# Altium PCB LightSwitch.PcbDoc
Units mil, origin at the board's own origin, x right, y up, seen from the top; angles counter-clockwise.
Board outline 2362.21 x 4330.71 mil, 2 copper layers (Top Layer, Bottom Layer); 71 components, 40 nets, 206 pads, 10 vias.
Unrouted connection lines stored in the file: 10.
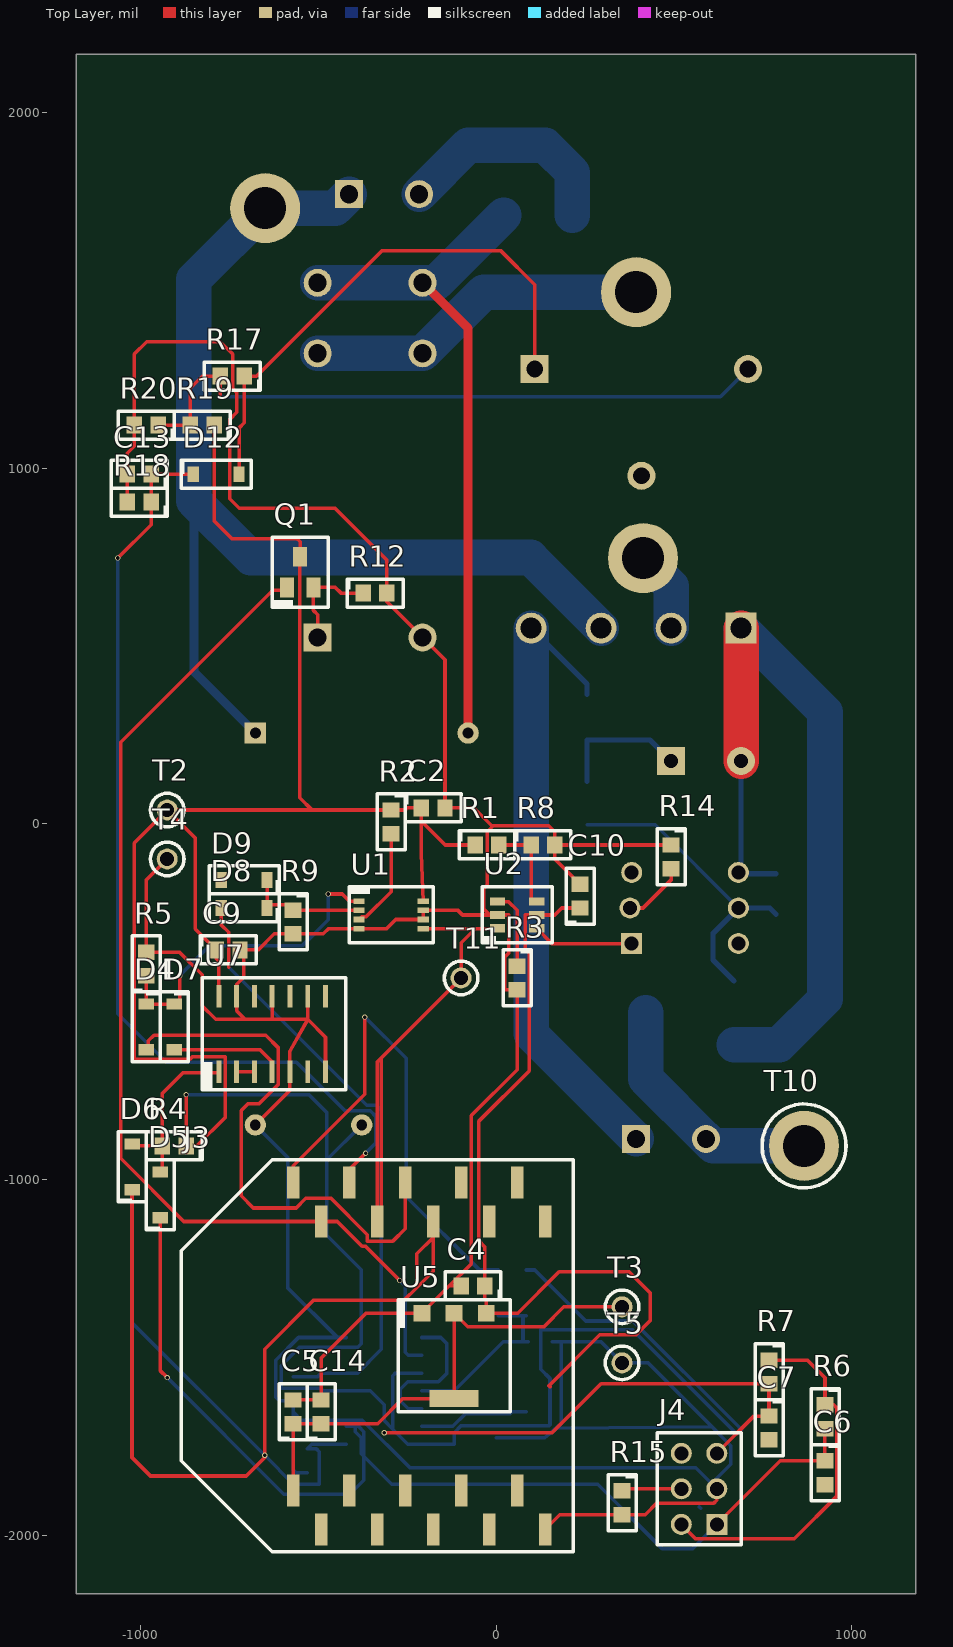
[diagram p0: Top Layer view]
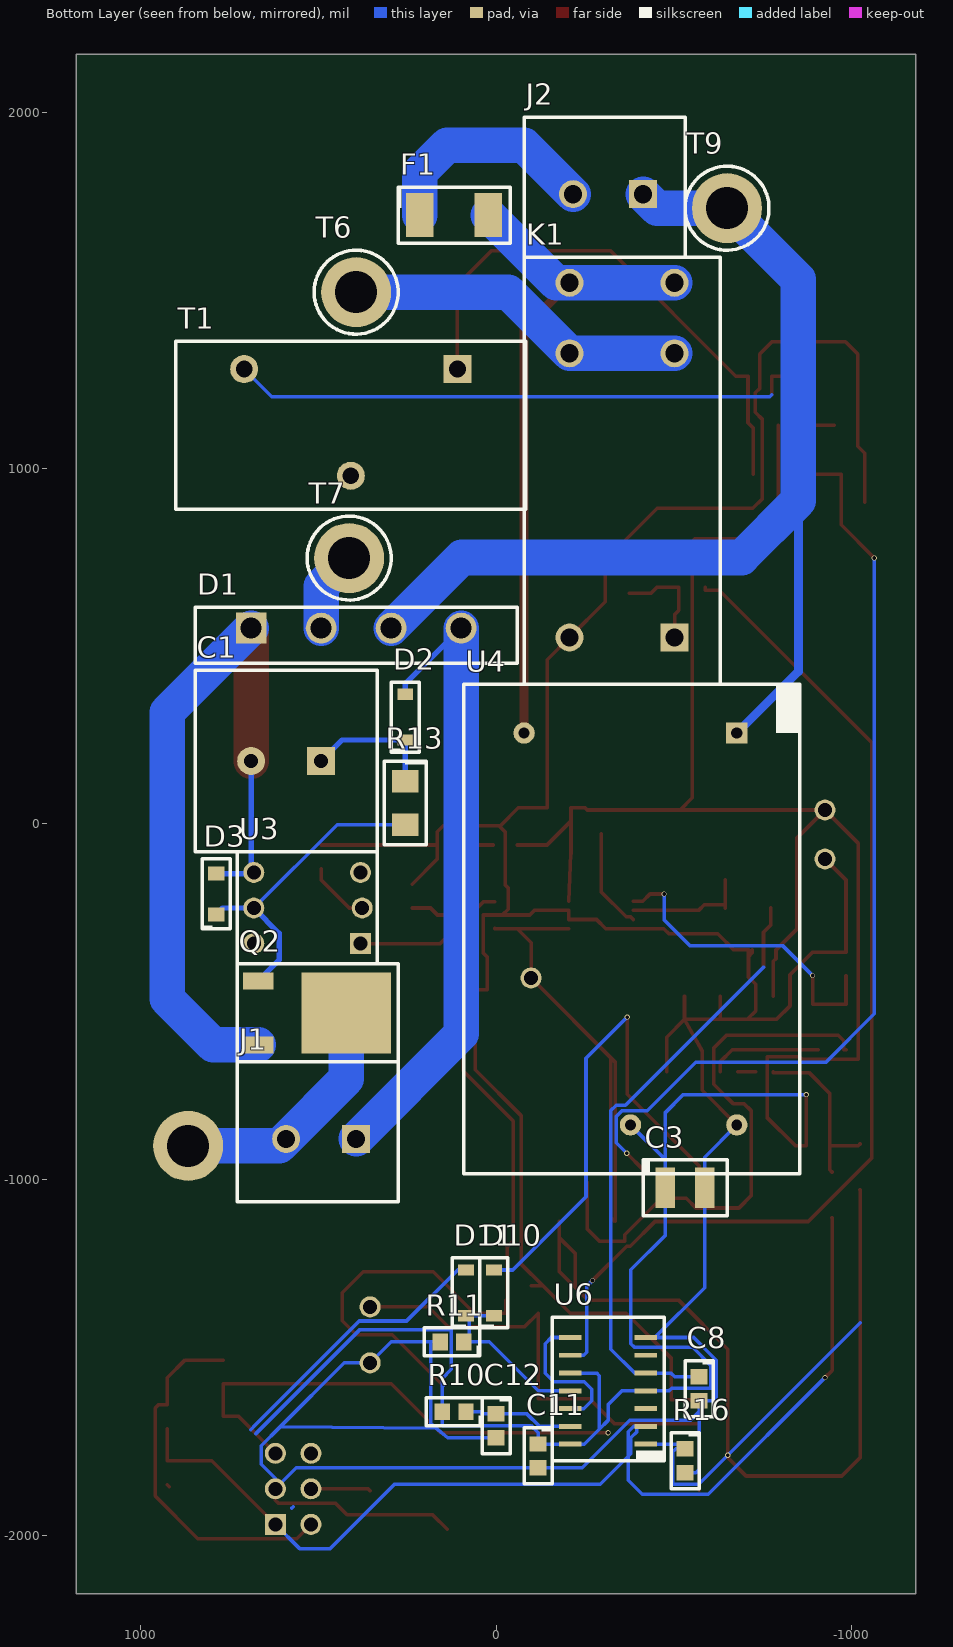
[diagram p1: Bottom Layer view, seen from below]

## Layer stack, top to bottom
Top Solder: solder mask 0.4, Solder Resist, Dk 3.5
Top Layer: signal copper 1.4
Dielectric 1: dielectric 12.6, FR-4, Dk 4.8
Bottom Layer: signal copper 1.4
Bottom Solder: solder mask 0.4, Solder Resist, Dk 3.5

## Board outline
1181.1,-2165.35 1181.1,2165.35 -1181.1,2165.35 -1181.1,-2165.35

## Design rules (kind name [scope] priority, off if disabled: settings)
Clearance [All] p1: gap=5 ignorepadtopadclearanceinfootprint=FALSE
PolygonConnect [All] p1: connectstyle=Relief reliefconductorwidth=10 reliefentries=4 polygonreliefangle="90 Angle" airgapwidth=10
RoutingVias [All] p1: holewidth=28 width=50 viastyle="Through Hole" minholewidth=28 minwidth=50 maxholewidth=28 maxwidth=50
SolderMaskExpansion [All] p1: expansion=4
Width "Schematic Width Constraint_12" [InNet('NetJ1_2')] p1: maxlimit=250 minlimit=15 preferedwidth=100 minimp=50.000000 maximp=50.000000 favimp=50.000000
Width "Schematic Width Constraint_4" [InNet('NetD1_4')] p2: maxlimit=250 minlimit=15 preferedwidth=100 minimp=50.000000 maximp=50.000000 favimp=50.000000
Width "Schematic Width Constraint_2" [InNet('NetF1_1')] p3: maxlimit=250 minlimit=15 preferedwidth=100 minimp=50.000000 maximp=50.000000 favimp=50.000000
Width "Schematic Width Constraint_1" [InNet('AC/L')] p4: maxlimit=250 minlimit=15 preferedwidth=100 minimp=50.000000 maximp=50.000000 favimp=50.000000
Width "Schematic Width Constraint" [InNet('AC/N')] p5: maxlimit=250 minlimit=15 preferedwidth=100 minimp=50.000000 maximp=50.000000 favimp=50.000000
Width "Schematic Width Constraint_6" [InNet('NetC1_2')] p6: maxlimit=250 minlimit=15 preferedwidth=100 minimp=50.000000 maximp=50.000000 favimp=50.000000
Width "Schematic Width Constraint_3" [InNet('NetK1_3')] p7: maxlimit=250 minlimit=100 preferedwidth=100 minimp=50.000000 maximp=50.000000 favimp=50.000000
Width "Schematic Width Constraint_5" [InNet('NetD1_2')] p8: maxlimit=250 minlimit=100 preferedwidth=100 minimp=50.000000 maximp=50.000000 favimp=50.000000
Width [All] p9: maxlimit=98425.2 minlimit=10 preferedwidth=10
30 further rules are at their usual default settings.

## Classes and differential pairs
component class Logic: C6 C7 C8 C9 C11 C12 D4 D5 D6 D7 D8 D9 D10 D11 J4 R4 R5 R6 R7 R9 R10 R11 R15 R16 U6 U7
component class XBee: C14 J3
component class Power: C3 C4 C5 C13 D12 F1 H1 J2 R17 R18 R19 R20 T1 T2 T3 T4 T5 U4 U5
component class Dimmer: C1 C2 C10 D1 D2 D3 J1 K1 Q1 Q2 R1 R2 R3 R8 R12 R13 R14 T6 T7 T9 T10 T11 U1 U2 U3

## Components (designator, comment, footprint, x,y, rotation, side; value= is the part's Value field where it differs from the comment)
C1 "CAP" CAP12.5X20 590.55,177.17 r0 bottom value=47uF
C2 "C_CAP_0603" 0603 -177.16,45.28 r90 top value=.1uF
C3 "C_CAP_1210" 1210 -531.5,-1023.62 r90 bottom value=100uF
C4 "C_CAP_0603" 0603 -64.96,-1299.21 r270 top value=.1uF
C5 "C_CAP_0603" 0603 -570.87,-1653.54 r180 top value=10uF
C6 "C_CAP_0603" 0603 925.2,-1824.8 r0 top value=.1uF
C7 "C_CAP_0603" 0603 767.72,-1698.82 r0 top value=.1uF
C8 "C_CAP_0603" 0603 -570.87,-1588.58 r180 bottom value=.1uF
C9 "C_CAP_0603" 0603 -753.94,-354.33 r90 top value=.1uF
C10 "C_CAP_0603" 0603 236.22,-202.75 r180 top value=.1uF
C11 "C_CAP_0603" 0603 -118.11,-1777.56 r180 bottom value=.1uF
C12 "C_CAP_0603" 0603 0,-1692.91 r180 bottom value=.1uF
C13 "C_CAP_0603" 0603 -1003.94,984.25 r270 top value=10uF
C14 "C_CAP_0603" 0603 -492.13,-1653.54 r180 top value=.1uF
D1 "D_RECTBRIDGE_GBU1506TB" GBU 393.7,551.18 r0 bottom
D2 "D_DIODE_SOD123" SOD123 255.91,300.59 r0 bottom
D3 "D_ZENER_SOD323" SOD323 787.4,-196.85 r0 bottom value=10V
D4 "D_DIODE_SOD123" SOD123 -984.25,-570.87 r0 top
D5 "D_DIODE_SOD123" SOD123 -944.88,-1043.31 r180 top
D6 "D_DIODE_SOD123" SOD123 -1023.62,-964.57 r180 top
D7 "D_DIODE_SOD123" SOD123 -905.51,-570.87 r0 top
D8 "D_DIODE_SOD123" SOD123 -708.66,-236.22 r270 top
D9 "D_DIODE_SOD123" SOD123 -708.66,-157.48 r270 top
D10 "D_DIODE_SOD123" SOD123 5.9,-1318.9 r0 bottom
D11 "D_DIODE_SOD123" SOD123 84.64,-1318.9 r0 bottom
D12 "D_DIODE_SOD123" SOD123 -787.4,984.25 r90 top
F1 "F_FUSE_2410" 2410 118.11,1712.6 r90 bottom value=12A/4A
J1 "J_2POSTERM_1935161" 1935161 492.13,-885.83 r0 bottom
J2 "J_2POSTERM_1935161" 1935161 -314.96,1771.65 r0 bottom
J3 "J_XBEE_NPPN101BFLC-RC" NPPN101BFLC-RC -216.54,-1496.06 r90 top
J4 "J_6POSM_M20-9980345" M20-9980345 570.87,-1870.08 r180 top
K1 "K_RELAY-RZ03-1A4_RZ03-1A4-D005" RZ03-1A4-D005 -354.33,1023.62 r270 bottom
Q1 "Q_NFET_SOT23" SOT23 -551.18,708.66 r0 top
Q2 "Q_NFET_TO252" TO252 669.29,-531.5 r270 bottom
R1 "R_RES_0603" 0603 -25.59,-59.06 r90 top value=1M
R2 "R_RES_0603" 0603 -295.27,5.91 r0 top value=806K
R3 "R_RES_0603" 0603 59.06,-433.07 r0 top value=196K
R4 "R_RES_0603" 0603 -905.51,-905.51 r270 top value=10K
R5 "R_RES_0603" 0603 -984.25,-393.7 r180 top value=10K
R6 "R_RES_0603" 0603 925.2,-1667.32 r0 top value=10K
R7 "R_RES_0603" 0603 767.72,-1541.34 r0 top value=10K
R8 "R_RES_0603" 0603 131.89,-59.06 r90 top value=280K
R9 "R_RES_0603" 0603 -570.87,-275.59 r0 top value=10K
R10 "R_RES_0603" 0603 118.11,-1653.54 r270 bottom value=470K
R11 "R_RES_0603" 0603 124.01,-1456.69 r270 bottom value=10K
R12 "R_RES_0603" 0603 -340.55,649.61 r90 top value=10K
R13 "R_RES_1206" 1206 255.91,59.06 r180 bottom value=100K
R14 "R_RES_0603" 0603 492.13,-92.52 r0 top value=180
R15 "R_RES_0603" 0603 354.33,-1909.45 r0 top value=10K
R16 "R_RES_0603" 0603 -531.5,-1791.34 r180 bottom value=10K
R17 "R_RES_0603" 0603 -742.13,1259.84 r270 top value=127
R18 "R_RES_0603" 0603 -1003.94,905.51 r270 top value=196K
R19 "R_RES_0603" 0603 -826.77,1122.05 r270 top value=10K
R20 "R_RES_0603" 0603 -984.25,1122.05 r270 top value=1.62K
T1 "T_CURRTRANS_AC1015" AC1015 408.66,1279.53 r180 bottom value=1000:1
T2 "TESTPOINT" TESTPOINT1MM -925.2,39.37 r0 top value=1mm
T3 "TESTPOINT" TESTPOINT1MM 354.33,-1358.27 r180 top value=1mm
T4 "TESTPOINT" TESTPOINT1MM -925.2,-98.43 r0 top value=1mm
T5 "TESTPOINT" TESTPOINT1MM 354.33,-1515.75 r180 top value=1mm
T6 "TESTPOINT" TESTPOINT3MM 393.7,1496.06 r270 bottom value=3mm
T7 "TESTPOINT" TESTPOINT3MM 413.39,748.03 r270 bottom value=3mm
T9 "TESTPOINT" TESTPOINT3MM -649.61,1732.28 r180 bottom value=3mm
T10 "TESTPOINT" TESTPOINT3MM 866.14,-905.51 r90 top value=3mm
T11 "TESTPOINT" TESTPOINT1MM -98.43,-433.07 r90 top value=1mm
U1 "U_DS4301_MSOP8" MSOP8 -295.28,-255.91 r270 top value=200K
U2 "U_LTC6992CS6-2_SOT23-6" SOT23-6 59.06,-255.91 r270 top
U3 "U_MCT275_DIP6" DIP6 531.5,-236.22 r0 bottom
U4 "U_IRM-02-5_IRM-02-5" IRM-02-5 -677.17,255.91 r270 bottom value=5V
U5 "U_LD1117S33TR_SOT223" SOT223 -118.11,-1496.06 r180 top value=3.3V
U6 "U_DUALDFLIP_SOIC14" SOIC14 -314.96,-1594.49 r90 bottom
U7 "U_SN74HCT04DR_SOIC14" SOIC14 -629.92,-590.55 r0 top

## Footprints (in the part's own frame and the unit in brackets; to place one, negate y for a bottom-side part, rotate by r counter-clockwise, add the part's x,y. Pads: shape width x height; smd on the part's side, far side on the other; paste and mask are expansions set on the pad)
0603 [mm]
  rect 1.2x1.1 smd: 1(0,0.85) 2(0,-0.85)
  silkscreen extent -1,-2 1,2, body extent -0.43,-0.77 0.43,0.78, height 0.44
1206 [mm]
  rect 1.9x1.6 smd: 1(0,1.55) 2(0,-1.55)
  silkscreen extent -1.5,-3 1.5,3, body extent -0.8,-1.6 0.8,1.6, height 1.5
1210 [mm]
  rect 2.9x1.4 smd: 1(0,1.4) 2(0,-1.4)
  silkscreen extent -2,-3 2,3, body extent -1.35,-1.75 1.35,1.75, height 2.7
2410 [mm]
  rect 3.15x1.96 smd: 1(0,2.455) 2(0,-2.455)
  silkscreen extent -2,-4 2,4, body extent -1.27,-3.05 1.27,3.05, height 2.58
1935161 [mm]
  rect 2x2 hole 1.3: 1(-2.5,0)
  round 2 hole 1.3: 2(2.5,0)
  silkscreen extent -5.5,-5.5 6,4.5, body extent -5.03,-5 5.54,4, height 11.4
AC1015 [mm]
  rect 2x2 hole 1.2: 1(7.62,0)
  round 2 hole 1.2: 2(-7.62,0) 3(0,-7.62)
  silkscreen extent -12.5,-10 12.5,2, body extent -11.9,-9.36 11.9,1.76, height 23.8
CAP12.5X20 [mm]
  rect 2x2 hole 1: 1(-2.5,0)
  round 2 hole 1: 2(2.5,0)
  silkscreen extent -6.5,-6.5 6.5,6.5, body extent -6.24,-6.25 6.24,6.25, height 20.33
DIP6 [mm]
  rect 1.5x1.5 hole 1: 1(-3.81,2.54)
  round 1.5 hole 1: 2(-3.935,0) 3(-3.81,-2.54) 4(3.81,-2.54) 5(3.81,0) 6(3.81,2.54)
  silkscreen extent -5,-4 5,4, body extent -3.94,-3.63 4.1,5.08, height 4.4
GBU [mm]
  rect 2.2x2.2 hole 1.5: 1(7.5,0)
  round 2.2 hole 1.5: 2(2.5,0) 3(-2.5,0) 4(-7.5,0)
  silkscreen extent -11.5,-1.5 11.5,2.5, body extent -11.02,-1.21 11.03,2.22, height 21.28
IRM-02-5 [mil] "IRM-02-5"
  rect 60x60 hole 31.5: 1(0,0)
  round 60 hole 31.5: 2(0,-598.43)
  round 60 hole 30: 3(1102.36,0) 4(1102.36,-299.22)
  silkscreen extent -138,-768 1240,177, body extent -112,-736 1215,138, height 591
M20-9980345 [mm]
  rect 1.5x1.5 hole 1: 1(-1.27,2.54)
  round 1.5 hole 1: 2(-1.27,0) 3(-1.27,-2.54) 4(1.27,-2.54) 5(1.27,0) 6(1.27,2.54)
  silkscreen extent -3,-4 3,4, body extent -2.54,-3.81 2.54,3.81, height 8.7
MSOP8 [mm]
  rect 0.4x0.8 smd: 1(-0.975,-2.3) 2(-0.325,-2.3) 3(0.325,-2.3) 4(0.975,-2.3) 5(0.975,2.3) 6(0.325,2.3) 7(-0.325,2.3) 8(-0.975,2.3)
  silkscreen extent -2,-3 2,3, body extent -1.5,-2.45 1.5,2.45, height 1.15
NPPN101BFLC-RC [mm]
  rect 2.29x0.89 smd: 1(-9.605,9) 2(-12.395,7) 3(-9.605,5) 4(-12.395,3) 5(-9.605,1) 6(-12.395,-1) 7(-9.605,-3) 8(-12.395,-5) 9(-9.605,-7) 10(-12.395,-9) 11(9.605,-9) 12(12.395,-7) 13(9.605,-5) 14(12.395,-3) 15(9.605,-1) 16(12.395,1) 17(9.605,3) 18(12.395,5) 19(9.605,7) 20(12.395,9)
  silkscreen extent -14,-11 14,17, body extent -13,-10.25 13,10.25, height 3.5
RZ03-1A4-D005 [mm]
  rect 2x2 hole 1.3: 1(12.67,3.75)
  round 2 hole 1.3: 2(12.67,-3.75) 3(-7.63,3.75) 4(-7.63,-3.75) 5(-12.67,-3.75) 6(-12.67,3.75)
  silkscreen extent -14.5,-7 16,7, body extent -13.82,-6.35 15.18,6.35, height 15.7
SOD123 [mm]
  rect 1.12x0.81 smd: 1(0,1.635) 2(0,-1.635)
  silkscreen extent -1,-2.5 1,2.5, body extent -0.85,-1.92 0.85,1.93, height 1.35
SOD323 [mm]
  rect 1.2x1 smd: 1(0,1.45) 2(0,-1.45)
  silkscreen extent -1,-2.5 1,2.5, body extent -0.72,-1.35 0.72,1.35
SOIC14 [mm]
  rect 0.35x1.6 smd: 1(-3.81,-2.7) 2(-2.54,-2.7) 3(-1.27,-2.7) 4(0,-2.7) 5(1.27,-2.7) 6(2.54,-2.7) 7(3.81,-2.7) 8(3.81,2.7) 9(2.54,2.7) 10(1.27,2.7) 11(0,2.7) 12(-1.27,2.7) 13(-2.54,2.7) 14(-3.81,2.7)
  silkscreen extent -5,-4 5.25,4, body extent -4.32,-3.02 4.32,3.02, height 1.59
SOT23 [mm]
  rect 1x1.4 smd: 1(-0.95,-1.1) 2(0.95,-1.1) 3(0,1.1)
  silkscreen extent -2,-2.5 2,2.5, body extent -1.5,-1.2 1.5,1.2, height 1.1
SOT23-6 [mm]
  rect 0.6x1.1 smd: 1(0.96,-1.4) 2(0,-1.4) 3(-0.96,-1.4) 4(-0.96,1.4) 5(0,1.4) 6(0.96,1.4)
  silkscreen extent -2,-2.5 2,2.5, body extent -1.5,-1.42 1.5,1.42
SOT223 [mm]
  rect 1.2x1.2 smd: 1(2.3,-3.05) 2(0,-3.05) 3(-2.3,-3.05)
  rect 3.5x1.2 smd: 4(0,3.05)
  silkscreen extent -4,-4 4,4, body extent -3.35,-3.45 3.25,3.7, height 0.25
TESTPOINT1MM [mm]
  round 1.5 hole 1: 1(0,0)
  silkscreen extent -1.2,-1.2 1.2,1.2
TESTPOINT3MM [mm]
  round 5 hole 3: 1(0,0)
  silkscreen extent -3,-3 3,3
TO252 [mm]
  rect 1.2x2.2 smd: 1(-2.28,0) 3(2.28,0)
  rect 5.8x6.4 smd: 2(0,6.3)
  silkscreen extent -3.5,-1.5 3.5,10, body extent -3.25,-0.35 3.25,8.35, height 2.3

## Part data
C1: library part C_CAP-P_CAP12.5X20, Manufacturer=Nichicon, PartNumber=UVR2D470MHD1TO, Rating=200V
C2 C6 C7 C8 C9 C10 C11 C12: Manufacturer=KEMET, PartNumber=C0603C104K5RACAUTO, Rating=50V
C3: Manufacturer=Murata, PartNumber=GRM32ER61A107ME20L, Rating=10V
C4 C14: Rating=50V
C5 C13: Manufacturer="Taiyo Yuden", PartNumber=JMK107ABJ106MA-T, Rating=6.3V
D1: Manufacturer="SMC Diode Solutions", PartNumber=GBU1506TB, Rating=15A
D2 D4 D5 D6 D7 D8 D9 D10 D11 D12: Manufacturer="Nexperia USA Inc", PartNumber=BAS16GWJ, Rating=215mA
D3: Manufacturer="On Semiconductor", PartNumber=MM3Z10VT1G, Rating=300mW
F1: Manufacturer="Bel Fuse", PartNumber=0679H9120-05/0679H4000-05, Rating=350VAC
J1 J2: Manufacturer="Phoenix Contact", PartNumber=1935161, Rating=17.5A
J3: Manufacturer="Sullins Connector Solutions", PartNumber=NPPN101BFLC-RC, Rating=1A
J4: Manufacturer=Harwin, PartNumber=M20-9980345, Rating=3A
K1: Manufacturer="TE Connectivity / Potter and Brumfield", PartNumber=RZ03-1A4-D005, Rating=16A
Q1: Manufacturer="On Semiconductor", PartNumber=BSS138, Rating=220mA
Q2: Manufacturer="Infineon Technologies", PartNumber=IPD50R280CEAUMA1, Rating=18.1A
R1: Manufacturer=Yageo, PartNumber=RC0603FR-071ML, Rating=1/10W
R2: Rating=1/10W
R3 R18: Manufacturer=Yageo, PartNumber=RC0603FR-07196KL, Rating=1/10W
R4 R5 R6 R7 R9 R11 R12 R15 R16: PartNumber=RC0603JR-0710KL, Rating=1/10W
R8: Manufacturer=Yageo, PartNumber=RC0603FR-07280KL, Rating=1/10W
R10: Manufacturer=Yageo, PartNumber=RC0603JR-07470KL, Rating=1/10W
R13: Manufacturer=Yageo, PartNumber=RC1206JR-07100KL, Rating=1/4W
R14: Manufacturer=Yageo, PartNumber=RC0603JR-07180RL, Rating=1/10W
R17: Manufacturer=Yageo, PartNumber=RC0603FR-07127RL, Rating=1/10W
R19: Manufacturer=Yageo, PartNumber=RC0603JR-0710KL, Rating=1/10W
R20: Manufacturer=Yageo, PartNumber=RC0603FR-071K62L, Rating=1/10W
T1: Manufacturer="Acme Electric/Amveco/Actown", PartNumber=AC1015, Rating=15A
T2 T3 T4 T5 T11: library part T_TESTPOINT_TESTPOINT1MM
T6 T7 T9 T10: library part T_TESTPOINT_TESTPOINT3MM
U1: Manufacturer=Maxim, PartNumber=DS4301
U2: PartNumber=LTC6992CS6-2
U3: Manufacturer=Vishay, PartNumber=MCT275
U4: PartNumber=IRM-02-5, Rating=400mA
U5: PartNumber=LD1117S33TR, Rating=800mA
U6: Manufacturer=TI, PartNumber=SN74HCT74DR
U7: Manufacturer=TI, PartNumber=SN74HCT04DR

## Via types
v1: diameter 15, hole 10, Top Layer to Bottom Layer, 10 vias

## Nets (pads, with @x,y where several pads share a name; then routed paths per layer and width w, separated by ;. In a path a pad name is that pad's centre, name@x,y a point inside that pad or via, vN(x,y) a via of type N, cw(c..) or ccw(c..) an arc to the next point about the centre after c; other vN are vias at no path point)
3V3: C5.1 C14.1 J3.1 T3.1 U5.2 U5.4 | length 1420.8
  Top Layer w10: J3.1 -570.87,-1781.08 C5.1 C14.1 -333.1,-1687.01 -262.24,-1616.14 U5.4 U5.2 -80.02,-1414.08 134.83,-1414.08 190.64,-1358.27 T3.1
5V: C2.1 C3.1 C4.1 C9.1 C10.1 C11.1 J4.6 Q1.3 R1.1 R2.1 R4.1 R6.1 R7.1 R10.2 R19.1 T2.1 U1.8 U2.5 U4.4 U5.3 U6.4 U6.10 U6.14 U7.14 | length 11515.4
  Top Layer w10: v1(-872.05,-761.08) R4.1 -842.17,-905.51 -762.17,-825.51 -762.17,-655.08 -854.17,-655.08 -861.17,-662.08 -1017.17,-662.08 -1018.17,-661.08 -1018.17,-53.61 T2.1 ; R19.1 -793.31,853.05 -743.17,802.92 -560.18,802.92 -551.18,793.92 Q1.3 -551.18,743.92 -552.17,743.92 -552.17,73.92 -517.62,39.37 ; U7.14 -779.92,-386.08 -787.4,-378.6 C9.1 -846.46,-295.27 -846.46,-39.37 T2.1 ; U1.8 -210.63,-83.17 -210.63,8.38 ; R1.1 -143.2,-59.05 -210.63,8.38 ; 151.58,-1582.83 148.83,-1580.08 291.9,-1437.01 393.7,-1437.01 433.07,-1397.64 433.07,-1318.9 374.02,-1259.84 177.16,-1259.84 61.02,-1375.98 U5.3 -27.56,-1340.08 -31.5,-1336.14 C4.1 -31.5,-1189.75 -48.17,-1173.08 -48.17,-835.57 92.83,-694.57 92.83,-363.08 81.83,-352.08 81.83,-255.9 U2.5 164.83,-255.9 184.51,-236.22 C10.1 ; J4.6 560.87,-2010.08 838.83,-2010.08 958.83,-1890.08 958.83,-1642.85 949.83,-1633.85 R6.1 925.2,-1558.08 874.99,-1507.87 R7.1 ; T2.1 -517.62,39.37 ; -517.62,39.37 R2.1 -256.17,39.37 -250.27,45.28 C2.1 -210.63,8.38
  Bottom Layer w10: v1(-872.05,-761.08) -526.79,-761.08 -476.38,-811.49 -476.38,-944.88 ; U4.4 -476.38,-944.88 ; U6.10 -283,-1544.49 -290.48,-1551.97 -290.48,-1702.27 ; 148.83,-1580.08 151.58,-1582.83 ; 675.39,-1714.65 382.83,-1422.08 125.83,-1422.08 125.83,-1534.08 151.58,-1559.83 151.58,-1582.83 ; -476.38,-944.88 C3.1 -476.38,-1157.08 -379.17,-1254.28 -379.17,-1462.08 -389.17,-1472.08 -553.1,-1472.08 -604.49,-1523.46 -604.49,-1586.77 -494.17,-1586.77 -486.46,-1594.49 U6.4 -354.17,-1594.49 -314.96,-1633.7 -314.96,-1677.79 -290.48,-1702.27 ; -290.48,-1702.27 -248.27,-1744.49 U6.14 -118.11,-1744.49 C11.1 -118.11,-1712.08 -98.11,-1692.08 149.58,-1692.08 151.58,-1690.08 R10.2 151.58,-1582.83
AC/L: F1.2 K1.5 K1.6 U4.2 | length 1921.7
  Top Layer w25: K1.5 -78.74,1394.49 U4.2
  Bottom Layer w100: K1.6 K1.5 -168.7,1522.44 F1.2
AC/N: D1.3 J2.1 T9.1 U4.1 | length 3177.4
  Bottom Layer w25: -850.17,909.23 -850.17,428.91 U4.1
  Bottom Layer w100: J2.1 -452.76,1732.28 T9.1 -850.17,1531.72 -850.17,909.23 -690.51,749.57 96.89,749.57 D1.3
CURRENT_SENSE: C13.1 D12.1 J3.18 R18.1 | length 2738.2
  Top Layer w10: v1(-1064.17,748.22) -970.47,841.92 R18.1 C13.1 D12.1 ; J3.18 -413.39,-972.08 v1(-367.17,-925.86)
  Bottom Layer w10: v1(-1064.17,748.22) -1064.17,-534.08 -928.17,-670.08 -561.55,-670.08 -425.17,-806.46 -354.17,-806.46 -337.95,-822.68 -337.95,-896.64 v1(-367.17,-925.86)
DIM_PWM: U2.6 U3.1 | length 284.9
  Top Layer w10: U2.6 156.69,-336.22 U3.1
DPOT_INC#: D4.1 D7.1 R5.1 U1.1 | length 904.2
  Top Layer w10: R5.1 D4.1 D7.1 -890.17,-506.5 v1(-890.17,-426.08) ; v1(-472.44,-196.85) -433.07,-196.85 -412.4,-217.52 U1.1
  Bottom Layer w10: v1(-890.17,-426.08) -807.17,-343.08 -546.17,-343.08 -472.44,-269.35 v1(-472.44,-196.85)
DPOT_OUT: J3.17 T11.1 U1.5 U2.1 | length 1929.4
  Top Layer w10: U1.5 -59.06,-294.29 ; U2.1 3.35,-294.29 -59.06,-294.29 ; T11.1 -322.95,-657.6 -322.95,-1106.22 J3.17 -334.65,-669.29 T11.1 ; T11.1 -98.43,-333.66 -59.06,-294.29
DPOT_U/D#: D8.1 D9.1 R9.1 U1.2 | length 343.8
  Top Layer w10: D8.1 D8.1@-644.29,-227.21 ; D9.1 D8.1@-644.29,-227.21 ; U1.2 -569.88,-243.11 R9.1 -585.79,-227.21 D8.1@-644.29,-227.21
ENC_A: C6.1 D5.1 J4.1 R6.2 U6.2 | length 3046.6
  Top Layer w10: D5.1 -945.17,-1107.68 -945.17,-1537.08 v1(-925.17,-1557.08) ; J4.1 799.61,-1791.34 C6.1@924.83,-1791.34 ; C6.1 C6.1@924.83,-1791.34 ; R6.2 924.83,-1700.78 C6.1@924.83,-1791.34
  Bottom Layer w10: v1(-925.17,-1557.08) -597.17,-1885.08 -411.17,-1885.08 -372.17,-1846.08 -372.17,-1778.08 ; U6.2 U6.2@-396.17,-1694.49 ; J4.1 552.87,-2038.08 466.87,-2038.08 285.87,-1857.08 -293.17,-1857.08 -372.17,-1778.08 ; U6.2@-396.17,-1694.49 -387.17,-1694.49 -372.17,-1709.49 -372.17,-1778.08 ; U6.2@-396.17,-1694.49 -396.17,-1709.08 -379.17,-1726.08 -379.17,-1771.08 -372.17,-1778.08
ENC_B: C7.1 J4.3 R7.2 U6.3 | length 1420.5
  Top Layer w10: v1(-314.96,-1712.6) 157.48,-1712.6 295.28,-1574.8 R7.2 ; J4.3 725.59,-1665.35 C7.1 R7.2
ENC_BUT2: D11.2 J4.5 R15.1 | length 967.2
  Top Layer w10: R15.1 360.24,-1870.08 J4.5
  Bottom Layer w10: D11.2 108.28,-1254.53 251.83,-1398.08 384.83,-1398.08 675.39,-1688.65 690.39,-1703.65 ; 570.87,-1920.08 575.39,-1924.61
ENC_U/D#: C8.1 D8.2 U6.5 | length 1723.3
  Top Layer w10: D8.2 -773.03,-284.08 -752.17,-304.94 -752.17,-403.08
  Bottom Layer w10: -752.17,-403.08 -745.17,-410.08 -363.8,-791.46 -337.57,-791.46 -322.95,-806.08 -322.95,-1477.86 -389.58,-1544.49 U6.5 -491.54,-1544.49 -502.17,-1555.12 C8.1
GND: C2.2 C3.2 C4.2 C5.2 C6.2 C7.2 C8.2 C9.2 C10.2 C11.2 C12.2 C13.2 C14.2 J3.10 J4.2 K1.2 R3.2 R5.2 R8.2 R9.2 R11.2 R12.2 R14.1 R15.2 R16.2 R18.2 R20.2 T4.1 T5.1 U1.4 U1.6 U1.7 U2.2 U4.3 U5.1 U6.7 U7.5 U7.7 U7.9 U7.11 U7.13 | length 12760.8
  Top Layer w10: R18.2 C13.2 -1037.4,1042.92 -1017.72,1062.61 R20.2 -1017.72,1321.92 -982.72,1356.92 -776.17,1356.92 -741.17,1321.92 -741.17,1224.92 -729.17,1212.92 -729.17,1157.92 -749.17,1137.92 -749.17,914.92 -722.17,887.92 -453.17,887.92 -307.09,741.84 R12.2 -307.09,625.2 K1.2 -143.7,461.81 C2.2 -62.53,45.28 -12.17,-5.08 -8.17,-5.08 ; T4.1 -984.25,-157.48 R5.2 -891.02,-360.24 -826.77,-424.48 -826.77,-511.81 -788.98,-549.61 -706.17,-549.61 ; C9.2 -720.47,-361.96 C9.2@-709.92,-372.51 ; U4.3 -579.92,-749.21 U7.5 -579.92,-638.98 -529.92,-549.61 ; U7.11 -629.92,-549.61 ; C5.2 C14.2 -492.13,-1502.03 -366.08,-1375.98 U5.1 -131.89,-1299.21 ; U7.9 -529.92,-549.61 ; U7.7 -479.92,-599.61 -529.92,-549.61 ; C4.2 -131.89,-1299.21 ; J3.10 178.93,-1942.91 R15.2 419.29,-1942.91 452.13,-1910.08 612.87,-1910.08 620.87,-1902.08 J4.2 ; C10.2 165.35,-98.42 R8.2 ; R14.1 R8.2 ; C6.2@919.29,-1864.17 C6.2 ; C9.2@-709.92,-372.51 -709.92,-354.33 -669.17,-354.33 -623.9,-309.05 R9.2 -486.17,-309.05 -471.41,-294.29 U1.4 -308.17,-294.29 -282.58,-268.7 U1.6 U1.7 -107.17,-243.11 -94.38,-255.9 -18.17,-255.9 ; C9.2@-709.92,-372.51 -709.92,-430.7 -729.92,-450.7 U7.13 -729.92,-525.86 -706.17,-549.61 ; -706.17,-549.61 -629.92,-549.61 ; -629.92,-549.61 -529.92,-549.61 ; -131.89,-1299.21 -70.17,-1237.49 -70.17,-820.08 59.05,-690.85 R3.2 24.83,-466.54 24.83,-374.08 35.83,-363.08 35.83,-255.9 U2.2 -18.17,-255.9 ; -18.17,-255.9 -34.17,-239.9 -34.17,-180.08 -25.17,-171.08 -25.17,-22.08 -8.17,-5.08 ; -8.17,-5.08 148.35,-5.08 165.35,-22.08 R8.2
  Bottom Layer w10: U4.3 -586.61,-937.01 C3.2 -586.61,-1304.05 U6.7@-446.17,-1444.49 ; R16.2 -562.17,-1824.8 -570.87,-1816.11 -570.87,-1654.08 ; U6.7 U6.7@-446.17,-1444.49 ; C12.2 136.53,-1726.38 ; R11.2 183.83,-1456.69 ; -570.87,-1654.08 C8.2 -610.17,-1622.05 -619.49,-1612.73 -619.49,-1508.39 -555.58,-1444.49 U6.7@-446.17,-1444.49 ; -570.87,-1654.08 -547.87,-1677.08 -376.17,-1677.08 -242.23,-1811.02 C11.2 561.81,-1811.02 J4.2 620.87,-1840.11 660.39,-1800.58 660.39,-1748.65 607.83,-1696.08 ; 136.53,-1726.38 183.83,-1686.08 183.83,-1456.69 ; 136.53,-1726.38 170.33,-1699.58 607.83,-1696.08 ; 183.83,-1456.69 295.27,-1456.69 T5.1 427.5,-1515.75 607.83,-1696.08
NetC1_1: C1.1 D2.1 R13.1 | length 376.8
  Bottom Layer w15: R13.1 D2.1 433.07,236.22 C1.1
NetC1_2: C1.2 D1.1 D3.2 Q2.3 U3.4 | length 2248.4
  Top Layer w100: C1.2 D1.1
  Bottom Layer w15: C1.2 688.98,-128.74 U3.4 685.04,-139.76 D3.2
  Bottom Layer w100: Q2.3 796.06,-621.26 925.2,-492.13 925.2,314.96 D1.1
NetC12_1: C12.1 R10.1 U6.13 | length 310.3
  Bottom Layer w10: U6.13 -122.17,-1694.49 -87.13,-1659.45 C12.1 38.83,-1659.45 44.73,-1653.54 R10.1
NetD1_2: D1.2 T7.1 | length 229.5
  Bottom Layer w100: T7.1 492.13,669.29 D1.2
NetD1_4: D1.4 D2.2 J1.1 | length 1810.8
  Bottom Layer w15: D1.4 255.9,393.7 D2.2
  Bottom Layer w100: D1.4 98.43,-590.55 J1.1
NetD3_1: D3.1 Q2.1 R13.2 U3.5 | length 895.4
  Bottom Layer w10: R13.2 447.25,-1.97 U3.5
  Bottom Layer w15: Q2.1 610.24,-382.68 610.24,-307.48 U3.5 769.69,-236.22 D3.1
NetD5_2: D5.2 D6.2 R4.2 U7.1 | length 495.9
  Top Layer w10: D6.2 -1018.31,-905.51 R4.2 ; D5.2 -938.98,-973.03 R4.2 ; U7.1 -779.92,-699.19 -880.09,-699.19 -938.98,-758.08 R4.2
NetD7_2: D7.2 U7.4 | length 317.3
  Top Layer w10: D7.2 -663.98,-635.24 -629.92,-669.29 U7.4
NetD10_1: D10.1 D11.1 R11.1 U6.11 | length 508.5
  Bottom Layer w10: U6.11 -118.11,-1594.49 19.68,-1456.69 R11.1@75.66,-1456.69 ; D10.1 D11.1@75.66,-1383.27 ; D11.1 D11.1@75.66,-1383.27 ; R11.1 R11.1@75.66,-1456.69 ; R11.1@75.66,-1456.69 D11.1@75.66,-1383.27
NetD12_2: D12.2 R17.1 T1.1 | length 1521.5
  Top Layer w10: D12.2 -723.03,1113.92 -708.66,1128.29 R17.1 -674.17,1259.84 -322.09,1611.92 13.83,1611.92 108.66,1517.09 T1.1
NetF1_1: F1.1 J2.2 | length 640.1
  Bottom Layer w100: J2.2 -78.74,1909.45 137.79,1909.45 214.76,1832.48 F1.1
NetJ1_2: J1.2 Q2.2 T10.1 | length 708.2
  Bottom Layer w100: Q2.2 421.26,-716.54 J1.2 610.24,-905.51 T10.1
NetK1_1: K1.1 Q1.2 R12.1 | length 291.7
  Top Layer w10: K1.1 -501.97,588.92 -513.78,600.73 Q1.2 -452.17,665.35 -436.43,649.61 R12.1
NetK1_3: K1.3 K1.4 T6.1 | length 966.9
  Bottom Layer w100: K1.3 K1.4 -34.64,1496.07 T6.1
NetR1_2: R1.2 R8.1 U2.4 | length 264.4
  Top Layer w10: R1.2 R8.1 98.42,-216.53 100,-218.11 U2.4
NetR2_2: R2.2 U1.3 | length 285.8
  Top Layer w10: U1.3 -378.11,-260.98 -365.94,-260.98 -295.28,-190.32 R2.2
NetR3_1: R3.1 U2.3 | length 222.1
  Top Layer w10: U2.3 34.25,-218.11 59.05,-242.91 R3.1
NetR14_2: R14.2 U3.2 | length 179.7
  Top Layer w10: U3.2 413.38,-236.22 492.13,-157.48 R14.2
NetR17_2: R17.2 R19.2 R20.1 T1.2 | length 1864.3
  Top Layer w10: R20.1 R19.2 -860.24,1225.92 -826.32,1259.84 R17.2 -775.59,1207.34
  Bottom Layer w10: -775.59,1207.34 -770.17,1201.92 631.06,1201.92 T1.2
NetU6_8: U6.8 U6.12 | length 412.2
  Bottom Layer w10: U6.12 -246.76,-1644.49 -269.17,-1622.08 -269.17,-1590.08 -248.17,-1569.08 -162.17,-1569.08 -138.17,-1545.08 -138.17,-1462.08 -155.76,-1444.49 U6.8
NetU7_2: U7.2 U7.3 | length 50
  Top Layer w10: U7.2 U7.3
RELAY_CTRL: J3.19 Q1.1 U6.9 | length 3008.6
  Top Layer w10: Q1.1 -588.58,657.92 -628.17,657.92 -1056.17,229.92 -1056.17,-940.08 -878.17,-1118.08 J3.19@-492.13,-1118.08 ; J3.19 J3.19@-492.13,-1118.08 ; v1(-271.17,-1284.08) -367.26,-1187.99 -377.03,-1187.99 -446.95,-1118.08 J3.19@-492.13,-1118.08
  Bottom Layer w10: v1(-271.17,-1284.08) -255.17,-1300.08 -255.17,-1486.08 -246.76,-1494.49 U6.9
XB_CTRL#: D6.1 J3.15 R16.1 U6.1 | length 3299.3
  Top Layer w10: D6.1 -1024.17,-1028.94 -1024.17,-1782.08 -972.17,-1834.08 -703.17,-1834.08 -651.17,-1782.08 v1(-651.17,-1776.08) -651.17,-1477.08 -513.17,-1339.08 -258.17,-1339.08 -223.17,-1304.08 ; J3.15 -177.17,-1163.07 ; -223.17,-1304.08 -177.17,-1258.07 -177.17,-1163.07 ; -223.17,-1304.08 -223.17,-1209.08 -177.17,-1163.07
  Bottom Layer w10: -1024.17,-1403.08 v1(-651.17,-1776.08) -570.17,-1857.08 -497.17,-1857.08 -497.17,-1766.08 -505.38,-1757.87 R16.1 -518.11,-1744.49 U6.1
XB_INC#: D4.2 J3.16 | length 1587.9
  Top Layer w10: D4.2 -978.17,-635.24 -978.17,-610.08 -962.17,-594.08 -648.17,-594.08 -612.17,-630.08 -612.17,-731.63 -667.94,-787.4 -698.5,-787.4 -717.17,-806.08 -717.17,-1046.08 -683.17,-1080.08 -562.17,-1080.08 -535.17,-1053.08 -464.17,-1053.08 -362.17,-1155.08 -362.17,-1173.08 -290.17,-1173.08 -255.91,-1138.81 J3.16
XB_RELAY_TOGGLE: D10.2 J3.20 | length 1446.2
  Top Layer w10: J3.20 -570.87,-961.77 -369.17,-760.08 v1(-369.17,-543.08)
  Bottom Layer w10: v1(-369.17,-543.08) -252.95,-659.3 -252.95,-1048.3 -46.72,-1254.53 D10.2
XB_U/D#: D9.2 J3.11
pads on no net: J3.2 J3.3 J3.4 J3.5 J3.6 J3.7 J3.8 J3.9 J3.12 J3.13 J3.14 J4.4 T1.3 U3.3 U3.6 U6.6 U7.6 U7.8 U7.10 U7.12

## Other copper
Bottom Layer:
  region: -748.03,-393.7